# EAGLE board uCschematic (EAGLE 9.6.2)
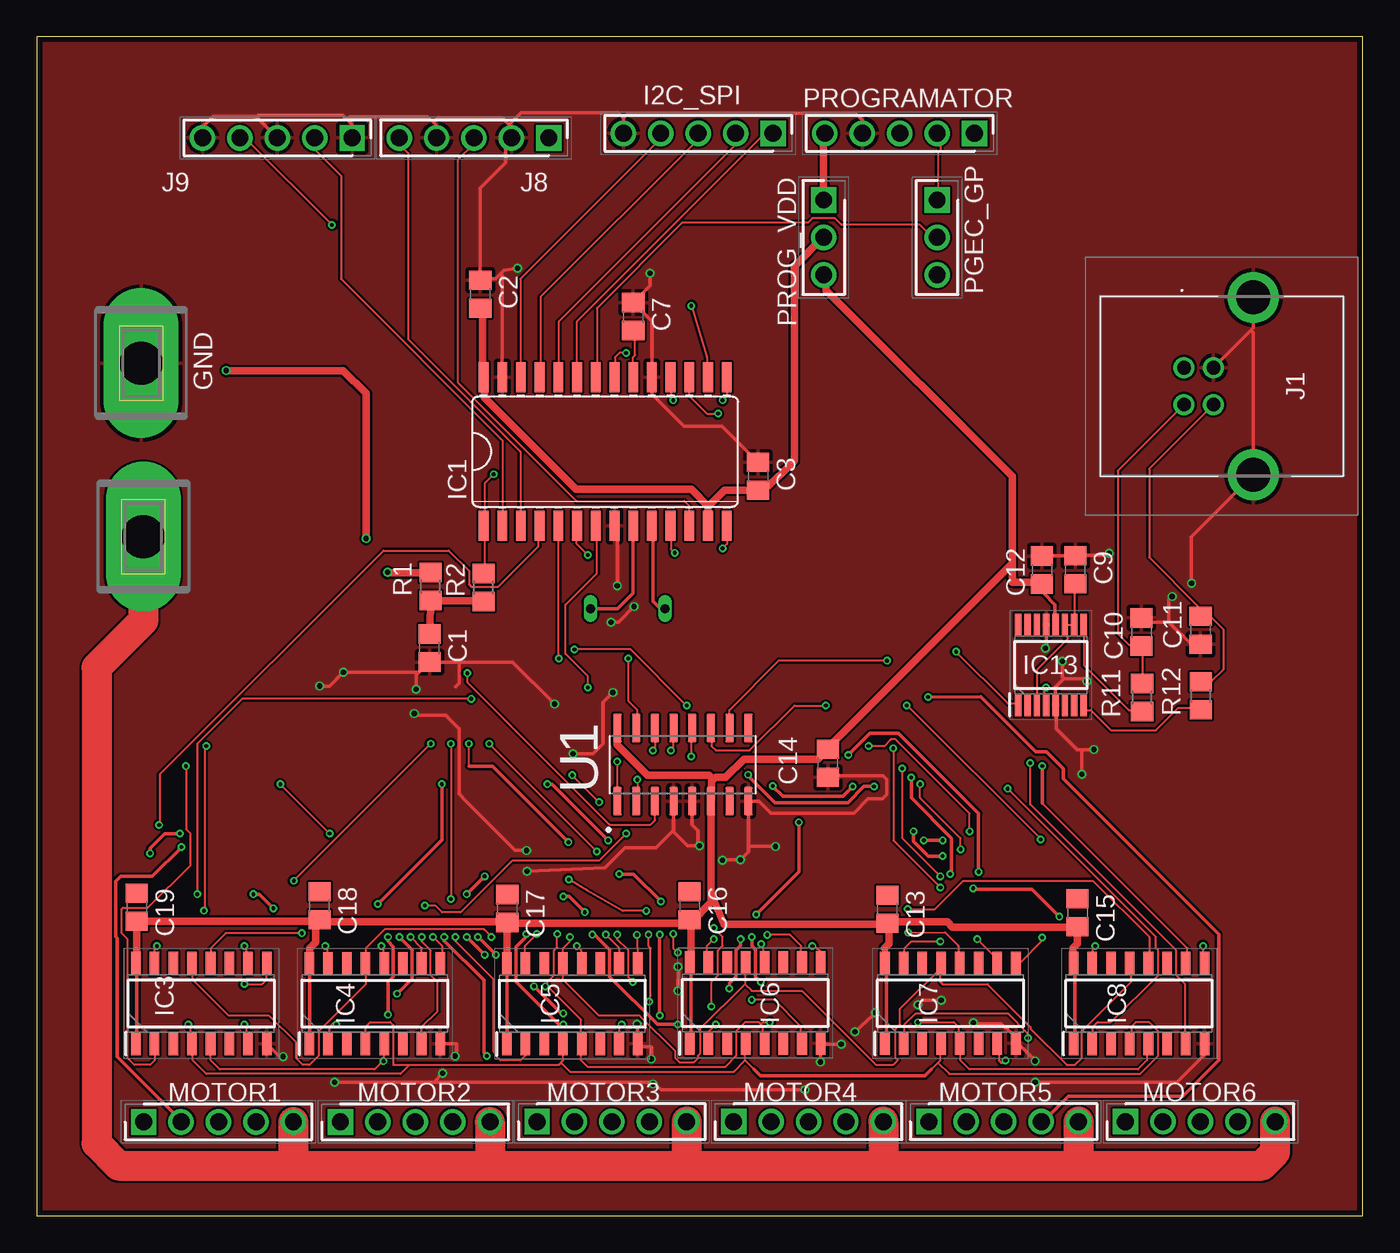
[diagram p0: board, top side]
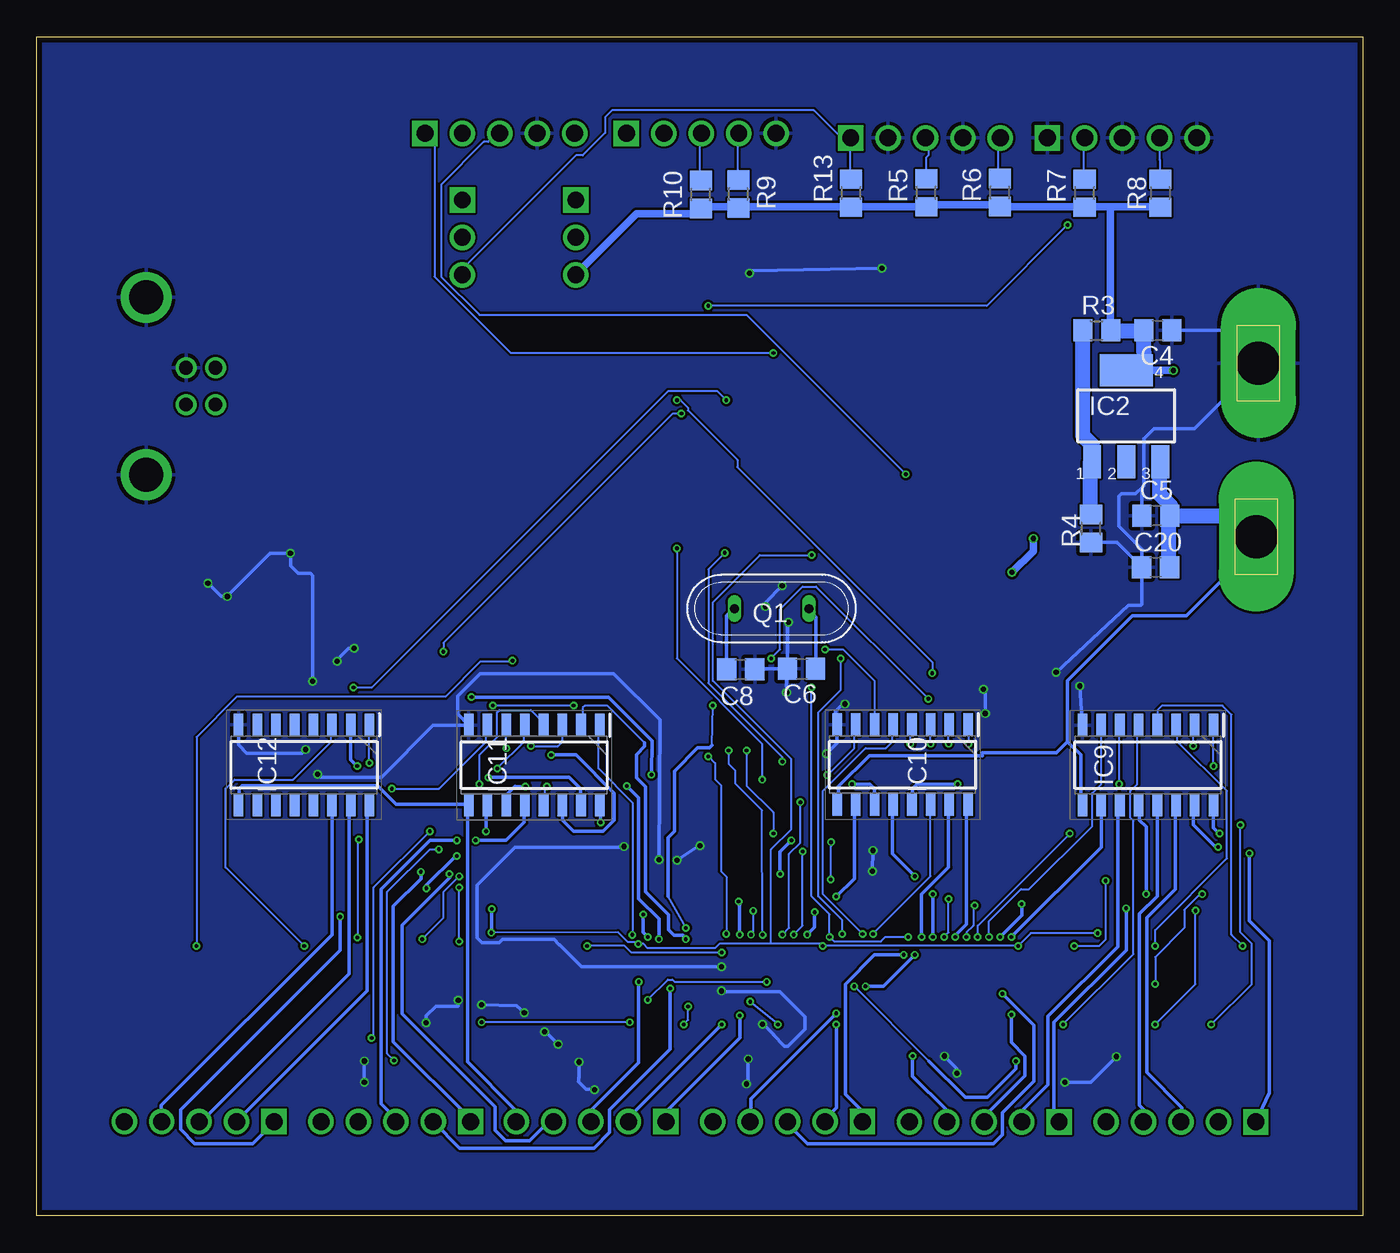
[diagram p1: board, bottom side, seen from below]

Size 90 x 80 mm. Coordinates in mm from the lower left corner, seen from the top.
Outline: 0,0 90,0 90,80 0,80 0,0
Copper layers (1*16): Top 0.035559375mm / dielectric 1.6mm / Bottom 0.035559375mm
Design rules "oshpark-2layer": minimum track width 6mil, minimum drill 10mil, track to track 6mil, track to pad 6mil, pad to pad 6mil, via to via 6mil, smd to smd 6mil, copper to edge 15mil, drill to drill 6mil, minimum pad ring 5mil, minimum via ring 5mil, stop-mask expansion 2.5mil, vias tented up to drill 0mil, thermal gap 10mil

## Footprints (pad centres in the part's own frame; a part is rotated, then mirrored left to right if it is on the bottom)
C0805 = smd 1.3 x 1.5: 1 -0.95,0; 2 0.95,0
62221 = drill 2.921 pad 5.08 long: 1 0,0
HDRV5W67P0X254_1X5_1270X241X85 = drill 1.15 pad 1.725 square: 1 0,0 | drill 1.15 pad 1.725: 2 2.54,0; 3 5.08,0; 4 7.62,0; 5 10.16,0
SO28W = smd 0.66 x 2.032: 1 -8.255,-5.029; 2 -6.985,-5.029; 3 -5.715,-5.029; 4 -4.445,-5.029; 5 -3.175,-5.029; 6 -1.905,-5.029; 7 -0.635,-5.029; 8 0.635,-5.029; 9 1.905,-5.029; 10 3.175,-5.029; 11 4.445,-5.029; 12 5.715,-5.029; 13 6.985,-5.029; 14 8.255,-5.029; 15 8.255,5.029; 16 6.985,5.029; 17 5.715,5.029; 18 4.445,5.029; 19 3.175,5.029; 20 1.905,5.029; 21 0.635,5.029; 22 -0.635,5.029; 23 -1.905,5.029; 24 -3.175,5.029; 25 -4.445,5.029; 26 -5.715,5.029; 27 -6.985,5.029; 28 -8.255,5.029
SOT223 = smd 1.219 x 2.235: 1 -2.311,-3.099; 2 0,-3.099; 3 2.311,-3.099 | smd 3.6 x 2.2: 4 0,3.099
SOIC127P600X175-16N = smd 1.55 x 0.65: 1 -2.725,4.445; 2 -2.725,3.175; 3 -2.725,1.905; 4 -2.725,0.635; 5 -2.725,-0.635; 6 -2.725,-1.905; 7 -2.725,-3.175; 8 -2.725,-4.445; 9 2.725,-4.445; 10 2.725,-3.175; 11 2.725,-1.905; 12 2.725,-0.635; 13 2.725,0.635; 14 2.725,1.905; 15 2.725,3.175; 16 2.725,4.445
SOIC127P600X175-16N' = smd 1.525 x 0.65: 1 -2.712,4.445; 2 -2.712,3.175; 3 -2.712,1.905; 4 -2.712,0.635; 5 -2.712,-0.635; 6 -2.712,-1.905; 7 -2.712,-3.175; 8 -2.712,-4.445; 9 2.712,-4.445; 10 2.712,-3.175; 11 2.712,-1.905; 12 2.712,-0.635; 13 2.712,0.635; 14 2.712,1.905; 15 2.712,3.175; 16 2.712,4.445
SOP64P599X175-16N = smd 1.526 x 0.435: 1 -2.712,2.222; 2 -2.712,1.588; 3 -2.712,0.952; 4 -2.712,0.318; 5 -2.712,-0.318; 6 -2.712,-0.952; 7 -2.712,-1.588; 8 -2.712,-2.222; 9 2.712,-2.222; 10 2.712,-1.588; 11 2.712,-0.952; 12 2.712,-0.318; 13 2.712,0.318; 14 2.712,0.952; 15 2.712,1.588; 16 2.712,2.222
UJ2BH1TH = drill 0.92 pad 1.431: 1 1.25,10.81; 2 -1.25,10.81; 3 -1.25,8.81; 4 1.25,8.81 | drill 2.3 pad 3.45: MH1 -6.02,6.1; MH2 6.02,6.1
HDRV3W97P0X254_1X3_721X234X821 = drill 1.15 pad 1.725 square: 1 0,0 | drill 1.15 pad 1.725: 2 2.54,0; 3 5.08,0
QS = drill 0.61 long: 1 -2.54,0; 2 2.54,0
R0805 = smd 1.3 x 1.5: 1 -0.95,0; 2 0.95,0
SOIC127P600X175-16N'' = smd 1.95 x 0.59: 1 -2.48,4.445; 2 -2.48,3.175; 3 -2.48,1.905; 4 -2.48,0.635; 5 -2.48,-0.635; 6 -2.48,-1.905; 7 -2.48,-3.175; 8 -2.48,-4.445; 9 2.48,-4.445; 10 2.48,-3.175; 11 2.48,-1.905; 12 2.48,-0.635; 13 2.48,0.635; 14 2.48,1.905; 15 2.48,3.175; 16 2.48,4.445

## Placement (x,y rotation side)
C1  100nF  [C0805]  26.66,38.53 270 top
C2  100nF  [C0805]  30.11,62.53 270 top
C3  100nF  [C0805]  48.96,50.18 270 top
C4  1u  [C0805]  13.91,60.08 180 bottom
C5  0.1u  [C0805]  14.04,47.51 0 bottom
C6  47pF  [C0805]  38.09,37.11 0 bottom
C7  10uF  [C0805]  40.49,61.02 270 top
C8  47pF  [C0805]  42.22,37.08 180 bottom
C9  0.1u  [C0805]  70.49,43.83 270 top
C10  47pF  [C0805]  74.99,39.62 270 top
C11  47pF  [C0805]  79,39.74 90 top
C12  0.1u  [C0805]  68.24,43.82 270 top
C13  0.1u  [C0805]  57.74,20.8 270 top
C14  0.1u  [C0805]  53.69,30.71 90 top
C15  0.1u  [C0805]  70.64,20.56 270 top
C16  0.1u  [C0805]  44.32,21.04 270 top
C17  0.1u  [C0805]  31.94,20.85 270 top
C18  0.1u  [C0805]  19.19,21.05 270 top
C19  0.1u  [C0805]  6.79,20.93 270 top
C20  100u  [C0805]  14.06,44.01 0 bottom
GND  PIN1-2  [62221]  7.08,57.86 90 top
I2C_SPI  68000-105HTLF  [HDRV5W67P0X254_1X5_1270X241X85]  49.98,73.45 180 top
IC1  PIC24FJXXGA002/SO  [SO28W]  38.58,51.86 0 top
IC2  317EMP  [SOT223]  16.06,54.28 0 bottom
IC3  MC74HC175ADG  [SOIC127P600X175-16N]  11.17,14.41 90 top
IC4  MC74HC175ADG  [SOIC127P600X175-16N]  22.95,14.4 90 top
IC5  MC74HC175ADG  [SOIC127P600X175-16N]  36.35,14.39 90 top
IC6  MC74HC175ADG  [SOIC127P600X175-16N]  48.77,14.44 90 top
IC7  MC74HC175ADG  [SOIC127P600X175-16N]  62.02,14.42 90 top
IC8  MC74HC175ADG  [SOIC127P600X175-16N]  74.82,14.41 90 top
IC9  ULN2003D1013TR  [SOIC127P600X175-16N']  14.58,30.58 270 bottom
IC10  ULN2003D1013TR  [SOIC127P600X175-16N']  31.23,30.61 270 bottom
IC11  ULN2003D1013TR  [SOIC127P600X175-16N']  56.24,30.58 270 bottom
IC12  ULN2003D1013TR  [SOIC127P600X175-16N']  71.87,30.6 270 bottom
IC13  FT230XS-U  [SOP64P599X175-16N]  68.84,37.38 90 top
J1  UJ2-BH-1-TH  [UJ2BH1TH]  88.68,56.3 90 top
J8  68000-105HTLF  [HDRV5W67P0X254_1X5_1270X241X85]  34.76,73.14 180 top
J9  68000-105HTLF  [HDRV5W67P0X254_1X5_1270X241X85]  21.41,73.14 180 top
MOTOR1  68000-105HTLF  [HDRV5W67P0X254_1X5_1270X241X85]  7.26,6.38 0 top
MOTOR2  68000-105HTLF  [HDRV5W67P0X254_1X5_1270X241X85]  20.61,6.38 0 top
MOTOR3  68000-105HTLF  [HDRV5W67P0X254_1X5_1270X241X85]  33.96,6.39 0 top
MOTOR4  68000-105HTLF  [HDRV5W67P0X254_1X5_1270X241X85]  47.31,6.39 0 top
MOTOR5  68000-105HTLF  [HDRV5W67P0X254_1X5_1270X241X85]  60.56,6.39 0 top
MOTOR6  68000-105HTLF  [HDRV5W67P0X254_1X5_1270X241X85]  73.91,6.39 0 top
PGEC_GP  5-146280-3  [HDRV3W97P0X254_1X3_721X234X821]  61.12,68.93 270 top
PROG_VDD  5-146280-3  [HDRV3W97P0X254_1X3_721X234X821]  53.42,68.93 270 top
PROGRAMATOR  68000-105HTLF  [HDRV5W67P0X254_1X5_1270X241X85]  63.66,73.45 180 top
Q1  [QS]  40.12,41.21 180 bottom
R1  10k  [R0805]  26.73,42.7 90 top
R2  220  [R0805]  30.33,42.64 90 top
R3  240  [R0805]  18.06,60.08 0 bottom
R4  390  [R0805]  18.44,46.64 90 bottom
R5  10k  [R0805]  29.63,69.42 90 bottom
R6  10k  [R0805]  24.63,69.44 90 bottom
R7  10k  [R0805]  18.88,69.4 90 bottom
R8  10k  [R0805]  13.74,69.4 270 bottom
R9  10k  [R0805]  42.38,69.34 90 bottom
R10  10k  [R0805]  44.93,69.3 90 bottom
R11  27  [R0805]  75.03,35.17 90 top
R12  27  [R0805]  79.02,35.28 90 top
R13  10k  [R0805]  34.73,69.4 90 bottom
U1  74HC237D-Q100J  [SOIC127P600X175-16N'']  43.86,30.62 90 top
VDD  12V  [62221]  7.24,46.09 270 top

## Library data of the parts
C1-C20 = eagle-ltspice; SPICEMODEL: NONE; SPICEPREFIX: C
GND VDD = con-faston; MF: TYCO ELECTRONICS; MPN: 62221-1; OC_FARNELL: unknown; OC_NEWARK: 16H2318
I2C_SPI J8 J9 MOTOR1-MOTOR6 PROGRAMATOR = 68000-105HTLF; ARROW_PART_NUMBER: 68000-105HTLF; ARROW_PRICE-STOCK: https://www.arrow.com/en/products/68000-105htlf/amphenol-fci; DESCRIPTION: 68000-105HTLF-B/S SR HDR 1*5; HEIGHT: 8.58mm; MANUFACTURER_NAME: Amphenol Communication Solutions; MANUFACTURER_PART_NUMBER: 68000-105HTLF; MOUSER_PART_NUMBER: 649-68000-105HTLF; MOUSER_PRICE-STOCK: https://www.mouser.co.uk/ProductDetail/Amphenol-FCI/68000-105HTLF?qs=w%2Fv1CP2dgqrYgNyQVoiqDw%3D%3D
IC1 = pic24gagb
IC2 = linear
IC3-IC8 = MC74HC175ADG; DESCRIPTION: ON Semiconductor MC74HC175ADG, D Type Flip Flop, LSTTL, 2 6 V, 16-Pin SOIC; HEIGHT: 1.75mm; MANUFACTURER_NAME: onsemi; MANUFACTURER_PART_NUMBER: MC74HC175ADG; MOUSER_PART_NUMBER: 863-MC74HC175ADG; MOUSER_PRICE-STOCK: https://www.mouser.co.uk/ProductDetail/onsemi/MC74HC175ADG?qs=qg33o%252B8vzFoIlG2G0iHepQ%3D%3D
IC9-IC12 = ULN2003D1013TR; DESCRIPTION: ULN2003D1013TR, Darlington Transistor Array, NPN 0.5A 50V, Array 7 HFE:1000, 16-Pin, SO; HEIGHT: 1.75mm; MANUFACTURER_NAME: STMicroelectronics; MANUFACTURER_PART_NUMBER: ULN2003D1013TR; MOUSER_PART_NUMBER: 511-ULN2003D1013TR; MOUSER_PRICE-STOCK: https://www.mouser.co.uk/ProductDetail/STMicroelectronics/ULN2003D1013TR?qs=YnPipOpXm6FQ98RZGZk5Pg%3D%3D
IC13 = FT230XS-U; ARROW_PART_NUMBER: FT230XS-U; ARROW_PRICE-STOCK: https://www.arrow.com/en/products/ft230xs-u/ftdi-chip; DESCRIPTION: USB Interface IC USB to Basic Serial UART IC SSOP-16; HEIGHT: 1.753mm; MANUFACTURER_NAME: FTDI Chip; MANUFACTURER_PART_NUMBER: FT230XS-U; MOUSER_PART_NUMBER: 895-FT230XS-U; MOUSER_PRICE-STOCK: https://www.mouser.co.uk/ProductDetail/FTDI/FT230XS-U?qs=Gp1Yz1mis3UZolxbXux7lw%3D%3D
J1 = UJ2-BH-1-TH; ARROW_PART_NUMBER: UJ2-BH-1-TH; ARROW_PRICE-STOCK: https://www.arrow.com/en/products/uj2-bh-1-th/cui-devices?region=nac; DESCRIPTION: USB Connectors USB 2.0 type B jack 4 pin Horizontal TH; HEIGHT: 10mm; MANUFACTURER_NAME: CUI Inc.; MANUFACTURER_PART_NUMBER: UJ2-BH-1-TH; MOUSER_PART_NUMBER: 490-UJ2-BH-1-TH; MOUSER_PRICE-STOCK: https://www.mouser.co.uk/ProductDetail/CUI-Devices/UJ2-BH-1-TH?qs=5mqXD9RfOg2PqeDe959d6w%3D%3D
PGEC_GP PROG_VDD = 5-146280-3; ARROW_PART_NUMBER: 5-146280-3; ARROW_PRICE-STOCK: https://www.arrow.com/en/products/5-146280-3/te-connectivity?region=nac; DESCRIPTION: Header vert 3 way 2.54mm AmpModu; HEIGHT: 8.21mm; MANUFACTURER_NAME: TE Connectivity; MANUFACTURER_PART_NUMBER: 5-146280-3; MOUSER_PART_NUMBER: 571-5-146280-3; MOUSER_PRICE-STOCK: https://www.mouser.co.uk/ProductDetail/TE-Connectivity/5-146280-3?qs=bwpFY26eRVf7xnwkMZzVxA%3D%3D
Q1 = special
R1-R10 R13 = eagle-ltspice; SPICEMODEL: NONE; SPICEPREFIX: R
R11 R12 = rcl; SPICEPREFIX: R
U1 = 74HC237D-Q100J; AVAILABILITY: In Stock; DESCRIPTION: Decoder/Demultiplexer 1 x 3:8 16-SO; MF: Nexperia USA Inc.; MP: 74HC237D-Q100J; PACKAGE: SOIC-16 Nexperia USA; PRICE: None; PURCHASE-URL: https://pricing.snapeda.com/search/part/74HC237D-Q100J/?ref=eda

## Nets
3.3V: C4.2 C12.2 C13.2 C14.2 C15.2 C16.2 C17.2 C18.2 C19.2 IC2.4 IC3.1 IC3.16 IC4.1 IC4.16 IC5.1 IC5.16 IC6.1 IC6.16 IC7.1 IC7.16 IC8.1 IC8.16 IC13.12 PROG_VDD.3 R1.2 R3.2 R5.1 R6.1 R7.1 R8.2 R9.1 R10.1 R13.1 U1.6 U1.16
12V: C5.2 C20.2 IC2.3 IC9.9 IC10.9 IC11.9 IC12.9 MOTOR1.5 MOTOR2.5 MOTOR3.5 MOTOR4.5 MOTOR5.5 MOTOR6.5 VDD.1
GND: C1.2 C2.1 C3.1 C4.1 C5.1 C6.1 C7.1 C8.1 C9.1 C10.1 C11.1 C12.1 C14.1 C20.1 GND.1 I2C_SPI.5 IC1.8 IC1.19 IC1.27 IC3.8 IC4.8 IC5.8 IC6.8 IC7.8 IC8.8 IC9.8 IC10.8 IC11.8 IC12.8 IC13.5 IC13.13 J1.4 J1.MH1 J1.MH2 J8.2 J8.4 J9.1 J9.3 J9.5 PROGRAMATOR.4 R4.1 U1.4 U1.5 U1.8
GP_OKIDAC: J8.1 PGEC_GP.3 R13.2
M0: IC3.9 U1.15
M0_0: IC3.2 IC9.1
M0_1: IC3.7 IC9.2
M0_2: IC3.10 IC9.3
M0_3: IC3.15 IC9.4
M1: IC4.9 U1.14
M1_0: IC4.2 IC9.5
M1_1: IC4.7 IC9.6
M1_2: IC4.10 IC9.7
M1_3: IC4.15 IC10.1
M2: IC5.9 U1.13
M2_0: IC5.2 IC10.2
M2_1: IC5.7 IC10.3
M2_2: IC5.10 IC10.4
M2_3: IC5.15 IC10.5
M3: IC6.9 U1.12
M3_0: IC6.2 IC10.6
M3_1: IC6.7 IC10.7
M3_2: IC6.10 IC11.1
M3_3: IC6.15 IC11.2
M4: IC7.9 U1.11
M4_0: IC7.2 IC11.3
M4_1: IC7.7 IC11.4
M4_2: IC7.10 IC11.5
M4_3: IC7.15 IC11.6
M5: IC8.9 U1.10
M5_0: IC8.2 IC11.7
M5_1: IC8.7 IC12.1
M5_2: IC8.10 IC12.2
M5_3: IC8.15 IC12.3
N$1: C1.1 R1.1 R2.1
N$2: IC1.1 PROGRAMATOR.3 R2.2
N$3: C7.2 IC1.20
N$4: C2.2 C3.2 IC1.13 IC1.28 PROG_VDD.2
N$6: C6.2 IC1.9 Q1.1
N$7: IC1.21 PROGRAMATOR.1
N$10: C8.2 IC1.10 Q1.2
N$11: IC2.1 R3.1 R4.2
N$12: IC1.7 IC3.13 IC4.13 IC5.13 IC6.13 IC7.13 IC8.13
N$13: IC1.6 IC3.12 IC4.12 IC5.12 IC6.12 IC7.12 IC8.12
N$14: IC1.11 U1.1
N$15: IC1.14 U1.2
N$16: IC1.15 U1.3
N$17: IC1.12 J8.3 R5.2
N$18: IC1.5 IC3.5 IC4.5 IC5.5 IC6.5 IC7.5 IC8.5
N$19: IC1.4 IC3.4 IC4.4 IC5.4 IC6.4 IC7.4 IC8.4
N$22: IC12.13
N$24: IC1.22 PGEC_GP.2
N$25: IC1.18 IC13.4
N$26: IC1.17 IC13.1
N$27: PROG_VDD.1 PROGRAMATOR.5
N$28: PGEC_GP.1 PROGRAMATOR.2
N$29: IC1.3 J8.5 R6.2
N$30: IC9.16 MOTOR1.1
N$31: IC9.15 MOTOR1.2
N$32: IC9.14 MOTOR1.3
N$33: IC9.13 MOTOR1.4
N$34: IC9.12 MOTOR2.1
N$35: IC9.11 MOTOR2.2
N$36: IC9.10 MOTOR2.3
N$37: IC1.2 J9.2 R7.2
N$38: IC1.16 J9.4 R8.1
N$39: I2C_SPI.1 IC1.23
N$40: I2C_SPI.2 IC1.24
N$41: I2C_SPI.3 IC1.25 R10.2
N$42: I2C_SPI.4 IC1.26 R9.2
N$45: C10.2 J1.2 R11.2
N$46: IC10.16 MOTOR2.4
N$47: IC10.15 MOTOR3.1
N$48: IC10.14 MOTOR3.2
N$49: IC10.13 MOTOR3.3
N$50: IC10.12 MOTOR3.4
N$51: IC10.11 MOTOR4.1
N$52: IC10.10 MOTOR4.2
N$53: C9.2 IC13.3 IC13.10 IC13.11
N$54: C11.2 J1.3 R12.2
N$55: IC13.9 R11.1
N$56: IC13.8 R12.1
N$58: C19.1
N$59: C18.1
N$61: IC12.15 MOTOR6.3
N$62: IC11.16 MOTOR4.3
N$63: IC11.15 MOTOR4.4
N$64: IC11.14 MOTOR5.1
N$65: IC11.13 MOTOR5.2
N$66: IC11.12 MOTOR5.3
N$67: IC11.11 MOTOR5.4
N$68: IC11.10 MOTOR6.1
N$69: C17.1
N$70: C16.1
N$73: IC12.4
N$74: IC12.5
N$75: IC12.6
N$76: IC12.7
N$77: C13.1
N$78: IC12.16 MOTOR6.2
N$80: IC12.14 MOTOR6.4
N$82: IC12.12
N$83: IC12.11
N$84: IC12.10
N$85: C15.1

## Tracks (layer width: path | path; a pad name or v marks a point on that pad's centre or on a via)
3.3V  (via drill 0.35)
  Top 0.152: 70.63,19.53 C15.2 | 70.33,17.25 IC8.16 70.48,17.1 | 70.48,11.76 IC8.1 | 57.51,17.16 57.54,17.17 IC7.16 57.68,17.1 | 57.68,11.76 IC7.1 | 57.83,19.84 C13.2 | 6.78,19.95 C19.2 | 6.78,17.25 IC3.16 6.78,17.1 | 6.78,11.76 IC3.1 | 18.51,17.25 IC4.16 18.51,17.1 | 18.51,11.76 IC4.1 | 19.09,19.99 C18.2 19.64,19.94 19.65,19.94 19.94,19.84 18.91,19.84 | 31.92,17.25 IC5.16 31.92,17.1 | 31.92,11.76 IC5.1 | 44.42,20 C16.2 | 44.42,17.25 IC6.16 44.42,17.1 | 44.42,11.76 IC6.1 | 68.34,42.85 C12.2 68.19,43 | 69.11,40.11 IC13.12 | 46.09,29.75 45.94,29.59 45.92,29.62 | 45.79,28.22 U1.6 | 53.74,31.8 C14.2 | 44.42,19.93 C16.2 | 32.52,19.84 C17.2 | 43.73,19.84 C16.2 | 39.39,33.1 U1.16 | 53.56,63.73 PROG_VDD.3
  Top 0.254: 70.48,17.1 70.48,11.76 | 57.68,17.1 57.68,11.76 | 6.78,17.1 6.78,11.76 | 18.51,17.1 18.51,11.76 | 31.92,17.1 31.92,11.76 | 44.42,17.1 44.42,11.76 | 68.34,42.85 68.34,42.24 69.11,41.48 69.11,40.11
  Top 0.406: 57.52,18.16 57.57,18.16 IC7.16
  Top 0.508: 70.63,19.53 70.63,18.47 70.33,18.16 70.33,17.25 | 57.52,18.16 57.83,18.47 57.83,19.84 57.83,19.94 61.8,19.94 62.15,19.59 70.61,19.59 C15.2 | 6.78,17.25 6.78,19.95 | 18.91,19.84 18.91,18.57 18.51,18.16 18.51,17.25 | 19.09,19.99 C19.2 | 31.92,17.25 31.92,19.84 32.52,19.84 43.73,19.84 | 44.42,17.25 44.42,20 | C14.2 53.01,30.98 47.99,30.98 46.76,29.75 46.09,29.75 | 45.79,28.22 45.79,29.49 45.92,29.62 45.64,29.9 41.47,29.9 39.39,31.98 39.39,33.1 | 68.19,43 66.21,43 66.21,44.27 | 53.74,31.8 66.21,44.27 | 44.42,19.93 45.76,21.27 U1.6 45.75,28.13 45.75,21.88 46.63,19.77 57.25,19.77 C13.2 | C17.2 31.89,19.94 19.64,19.94 | 53.56,63.73 53.56,62.82 66.21,50.17 66.21,44.27 | v12.86,57.36 20.8,57.36 22.36,55.81 v22.36,45.96 | v23.8,43.66 23.82,43.65 R1.2
  Bottom 0.152: 15,60.07 C4.2 | 16.99,60.07 R3.2 17.14,60.23 | 14.85,58.55 15.92,57.48 IC2.4 | 13.79,68.45 R8.2 | 18.81,68.45 R7.1 18.97,68.45 | 42.44,68.45 R9.1 42.28,68.45 | 44.88,68.45 R10.1 45.03,68.3 45.33,68 | 24.76,68.61 R6.1 24.61,68.45 | 29.48,68.61 R5.1 29.64,68.45 | 34.66,68.45 R13.1 34.82,68.45 | 53.41,63.88 PROG_VDD.3
  Bottom 0.508: 18.81,68.45 17.14,68.45 | 17.14,68.45 13.79,68.45 | 44.88,68.45 42.44,68.45 | 29.48,68.61 24.76,68.61 | 29.64,68.45 34.66,68.45 | 34.82,68.45 42.28,68.45 | 24.61,68.45 18.97,68.45 | 53.41,63.88 49.29,68 45.33,68 | 17.14,68.45 17.14,60.23 | IC2.4 12.87,57.38 v12.86,57.36 | v22.36,45.96 22.36,45.11 v23.8,43.66
  Bottom 1.016: 16.99,60.07 15,60.07 | 14.85,58.55 C4.2
12V
  Top 2.03: VDD.1 7.24,40.39 4.05,37.21 4.05,4.91 5.55,3.41 17.36,3.41 | 17.36,3.41 30.86,3.41 | 30.86,3.41 44.26,3.41 | 44.26,3.41 57.66,3.41 | 57.66,3.41 70.66,3.41 | 70.66,3.41 83.16,3.41 84.06,4.32 MOTOR6.5 | MOTOR5.5 70.72,3.47 70.66,3.41 | MOTOR4.5 57.47,3.6 57.66,3.41 | MOTOR3.5 44.12,3.55 44.26,3.41 | MOTOR2.5 30.77,3.5 30.86,3.41 | MOTOR1.5 17.41,3.47 17.36,3.41
  Bottom 0.152: 60.72,27.92 IC11.9 60.77,27.65 | 76.27,27.92 IC12.9 | 57.52,6.43 MOTOR4.5 | 13.18,44.07 C20.2 | 13.18,47.42 C5.2 13.02,47.58 13.02,48.19 | 19.12,27.92 IC9.9 | 35.58,27.92 IC10.9 | 13.79,51.08 IC2.3 | 25.82,31.22 25.82,31.42
  Bottom 0.254: 60.72,27.92 65.6,27.92 66.87,29.19 76.06,29.19 76.27,28.98 76.27,27.92 | 60.77,27.65 60.77,10.44 57.52,7.19 57.52,6.43 | 19.12,27.92 19.12,31.27 20.03,32.18 | 20.03,32.18 20.03,36.3 15.62,40.71 11.96,40.71 7.24,45.43 VDD.1 | 35.58,27.92 35.58,29.14 33.49,31.22 25.82,31.22 | 25.82,31.42 20.8,31.42 20.03,32.18
  Bottom 1.016: 13.18,47.42 13.18,44.07 | 13.79,51.08 13.79,48.95 13.02,48.19 | C5.2 8.65,47.51 VDD.1
GND  (via drill 0.35)
  Top 0.254: IC3.8 16.49,10.8 v16.73,10.8 | v28.4,10.84 28.5,10.94 28.5,11.68 28.5,11.67 IC4.8 | v41.71,10.64 41.71,11.44 41.68,11.47 40.98,11.47 IC5.8 40.79,12.83 v40.74,12.99 | 26.96,9.06 41.51,9.06 v41.82,8.94 42.41,8.56 v52.15,8.56 | 26.96,9.06 v20.2,9.06 | v53.19,10.44 53.21,10.44 IC6.8 53.29,11.63 v54.61,11.63 | v67.77,10.5 66.58,11.69 IC7.8 66.46,12.16 65.45,13.02 63.64,13.03 v63.57,13.11 | v67.77,9.06 77.37,9.06 79.21,10.9 79.21,11.63 IC8.8 | 26.96,9.06 v27.55,9.66 | 59.69,14.29 v59.8,14.32 60.12,14.64 v61.39,14.64 | v56.91,13.77 56.76,13.61 v55.54,12.48 | v19.2,35.95 19.88,35.95 v20.81,36.88 25.95,36.88 | 25.95,36.88 C1.2 28.71,37.58 | 28.71,37.58 32.3,37.58 v35.14,34.73 | v36.4,31.36 37.76,31.36 38.43,32.03 38.43,34.84 v39.1,35.51 | v38.97,40.28 39.47,40.28 v40.54,41.35 | v39.4,42.75 39.4,46.63 IC1.8 | J9.5 11.24,73.9 11.97,74.62 14.84,74.62 14.91,74.55 | 14.91,74.55 J9.3 | J9.1 21.41,74.03 21.05,74.39 | 21.05,74.39 20.76,74.68 15.04,74.68 14.91,74.55 | J8.4 27.14,73.97 26.92,74.19 | 26.92,74.19 26.54,74.56 21.22,74.56 21.05,74.39 | 32.05,74.03 32.22,73.86 J8.2 31.8,72.73 31.8,71.44 30.11,69.74 C2.1 30.23,63.6 31.16,63.6 31.48,63.93 | 32.05,74.03 31.57,74.51 27.24,74.51 26.92,74.19 | I2C_SPI.5 39.81,74.48 | 39.81,74.48 39.45,74.84 32.86,74.84 32.05,74.03 | PROGRAMATOR.4 56.03,74.34 55.56,74.81 40.15,74.81 39.81,74.48 | C3.1 46.52,53.57 43.92,53.57 41.75,55.74 IC1.19 41.75,60.7 C7.1 41.63,63.12 v41.63,63.96 | IC1.27 31.59,63.82 31.48,63.93 | v32.63,64.29 31.73,64.17 31.48,63.93 | J1.MH2 82.58,60.26 82.41,60.09 | 82.41,60.09 J1.4 | 82.41,60.09 82.58,59.92 J1.MH1 78.39,46.08 v78.39,42.93
  Top 0.254: C9.1 C12.1 | C11.1 78.36,38.79 76.86,40.29 | 76.86,40.29 75.26,40.29 C10.1 | 76.86,40.29 76.86,41.82 v77.07,42.03 | 70.78,45.11 70.47,44.8 70.47,44.53 70.61,44.53 70.75,44.66 70.59,44.82 72.66,44.82 v72.78,44.95 | 69.72,36.44 69.15,35.88 IC13.5 69.22,34.6 69.22,33.05 70.62,31.64 v71.74,31.64 70.94,31.64 v70.94,29.95 | 69.72,36.44 71.11,36.44 v71.28,36.27 | IC13.13 68.52,38.55 v68.47,38.5 | v69.61,37.63 69.61,36.55 69.72,36.44 | v43.53,15.26 43.55,16.86 v43.52,16.89 | 48.3,25.18 U1.8 49.01,28.14 49.82,27.33 55.46,27.33 56.42,28.29 57.4,28.29 57.72,28.61 57.72,29.57 57.43,29.86 53.8,29.86 C14.1 | 48.3,25.18 48.3,24.69 v47.77,24.15 46.55,24.15 v46.53,24.14 | U1.5 44.49,26.53 44.89,26.13 44.89,25.22 v44.99,25.12 44.17,25.12 43.22,26.07 U1.4 43.22,26.16 42.05,24.99 39.94,24.99 38.57,23.62 v33.27,23.37 | 48.3,25.18 48.42,25.06 v50.14,25.06 | v33.25,24.79 32.48,24.79 28.9,28.37 28.9,28.4 28.67,28.64 28.67,33.05 27.76,33.95 25.76,33.95 v25.62,34.09 | 28.42,35.89 28.67,36.14 28.67,37.54 28.71,37.58 | v25.76,35.73 25.76,36.68 25.95,36.88
  Bottom 0.254: v16.73,10.8 18.46,9.06 v20.2,9.06 | 28.4,10.76 v28.4,10.84 27.55,9.99 v27.55,9.66 | v53.19,10.44 53.19,9.37 53.22,9.37 53.22,9.1 52.72,8.6 52.18,8.6 v52.15,8.56 | v67.77,10.5 v67.77,9.06 | v41.71,10.64 41.71,9.05 v41.82,8.94 | v63.57,13.11 63.57,13.57 62.91,14.22 61.4,14.22 v61.39,14.64 | v59.8,14.32 57.42,14.25 v56.91,13.77 | v55.54,12.48 55.32,12.35 54.74,11.77 | 54.74,11.77 | 54.74,11.77 v54.61,11.63 | C4.1 9.29,60.08 GND.1 7.43,57.51 7.43,57.42 11.44,53.4 14.17,53.4 14.85,52.72 14.85,49.55 14.98,49.41 | R4.1 16.68,45.69 C20.1 | C20.1 15.01,45.24 16.54,46.78 16.54,48.82 16.38,48.98 15.41,48.98 14.98,49.41 | C5.1 14.98,49.41 | C20.1 15.01,41.49 15.05,41.44 15.9,41.44 v20.81,36.88 | v19.2,35.95 19.07,33.8 IC9.8 | v35.14,34.73 35.28,34.73 35.78,34.23 35.78,33.43 IC10.8 35.68,32.08 v36.4,31.36 | v39.1,35.51 39.1,37.04 C6.1 | C6.1 41.23,37.11 C8.1 | C6.1 39.03,40.21 v38.97,40.28 | v40.54,41.35 40.54,41.61 v39.4,42.75 | v32.63,64.29 41.47,64.12 v41.63,63.96 | v78.39,42.93 77.48,42.03 v77.07,42.03 74.14,44.95 v72.78,44.95 72.78,44.12 72.25,43.59 71.42,43.59 71.28,43.44 v71.28,36.27 | v68.47,38.5 68.84,38.5 69.47,37.87 69.47,37.77 v69.61,37.63 | IC12.8 76.31,31.95 75.76,31.4 71.98,31.4 v71.74,31.64 | v40.74,12.99 40.58,12.88 40.01,12.31 40.01,12.28 39.24,11.51 39,11.51 37.87,12.64 37.87,13.52 39.54,15.19 43.35,15.19 v43.53,15.26 | v43.52,16.89 53.02,16.89 54.52,18.4 54.54,18.4 54.89,18.75 58.39,18.75 58.62,18.53 59.78,18.53 60.12,18.87 60.12,22.42 57.53,25.01 50.19,25.01 v50.14,25.06 | v46.53,24.14 45.01,25.14 v44.99,25.12 | v70.94,29.95 70.76,29.77 66.61,29.77 63.09,33.29 IC11.8 61.45,34.06 61.45,35.25 59.9,36.8 50.84,36.8 47.7,33.65 v47.77,24.15
  Bottom 0.254: v33.27,23.37 v33.25,24.79 | v25.62,34.09 25.62,35.59 v25.76,35.73
  pour Top: -0.5,-0.5 91.78,-0.5 91.78,80.5 -0.5,80.5
  pour Bottom: -0.5,-0.5 93.81,-0.5 93.81,80.5 -0.5,80.5
GP_OKIDAC
  Bottom 0.152: R13.2 34.82,70.44 34.82,73.03 J8.1 34.82,73.18 35.43,73.18 37.26,75.01 50.97,75.01 51.43,74.55 51.43,73.48 52.95,71.96 53.41,71.96 61.03,64.34 61.03,63.88 PGEC_GP.3
M0  (via drill 0.25)
  Top 0.152: v14.09,15.72 15.31,15.72 15.61,16.03 15.61,17.1 IC3.9 | v10.89,21.82 10.89,32.03 13.94,35.08 v29.48,35.08 | v40.15,37.82 40.15,34.93 40.76,34.32 40.76,33.25 U1.15
  Bottom 0.152: v14.09,15.72 14.09,17.55 12.11,19.53 12.11,20.75 11.04,21.82 v10.89,21.82 | v29.48,35.08 37.1,42.7 38.02,42.7 39.54,41.17 39.54,38.43 v40.15,37.82
M0_0  (via drill 0.25)
  Top 0.152: v10.13,30.51 10.13,26.24 10.43,25.93 10.43,23.8 7.54,20.91 5.86,20.91 5.76,20.8 5.76,19.18 6.17,18.77 6.17,10.7 6.62,10.24 7.69,10.24 7.99,10.54 7.99,11.61 IC3.2
  Bottom 0.152: v10.13,30.51 10.13,33.25 IC9.1
M0_1  (via drill 0.25)
  Top 0.152: v11.5,31.88 11.4,31.78 11.4,20.75 v11.35,20.7 | v14.09,12.98 14.24,12.83 14.24,11.76 IC3.7
  Bottom 0.152: v11.5,31.88 11.5,33.25 IC9.2 | v11.35,20.7 11.35,15.72 v14.09,12.98
M0_2  (via drill 0.25)
  Top 0.152: v14.09,18.32 14.24,18.16 14.24,17.25 IC3.10
  Bottom 0.152: v14.09,18.32 14.09,19.38 9.21,24.26 9.21,28.83 12.57,32.18 12.57,33.25 IC9.3
M0_3  (via drill 0.25)
  Top 0.152: v8.15,18.32 7.99,18.16 7.99,17.25 IC3.15
  Bottom 0.152: v8.15,18.32 8.91,19.08 8.91,34.01 9.52,34.62 13.63,34.62 13.94,34.32 13.94,33.4 IC9.4
M1  (via drill 0.25)
  Top 0.152: v26.89,18.93 27.5,18.32 27.5,17.25 IC4.9 | v26.33,21.05 27.05,21.05 27.51,20.59 28.76,20.59 32.28,24.11 38.17,24.11 v40,25.93 | v41.83,31.57 41.98,31.73 41.98,33.1 U1.14
  Bottom 0.152: v26.89,18.93 26.89,19.23 26.43,19.69 26.43,20.95 v26.33,21.05 | v40,25.93 40,27.37 41.83,29.2 v41.83,31.57
M1_0  (via drill 0.25)
  Top 0.152: v20.34,12.98 20.19,13.13 19.88,12.83 19.88,11.76 IC4.2
  Bottom 0.152: v20.34,12.98 15.56,17.76 15.56,26.8 15.77,27 15.77,28.83 15.31,29.29 15.31,33.25 IC9.5
M1_1  (via drill 0.25)
  Top 0.152: v19.88,25.93 v16.53,29.29 | v26.13,18.93 26.13,18.62 26.74,18.01 26.74,16.33 27.2,15.88 27.2,13.89 26.13,12.83 26.13,11.76 IC4.7
  Bottom 0.152: v16.53,29.29 16.53,33.25 IC9.6 | v19.88,25.93 26.13,19.69 v26.13,18.93
M1_2  (via drill 0.25)
  Top 0.152: v25.37,18.93 26.13,18.16 26.13,17.25 IC4.10
  Bottom 0.152: v25.37,18.93 25.37,19.99 23.2,22.16 22.64,22.16 18.36,26.44 18.36,28.68 17.75,29.29 17.75,33.25 IC9.7
M1_3  (via drill 0.25)
  Top 0.152: v17.44,22.73 v26.74,32.03 | v19.58,18.32 19.73,18.16 19.73,17.25 IC4.15
  Bottom 0.152: v26.74,32.03 26.74,33.25 IC10.1 | v17.44,22.73 17.44,18.76 17.89,18.32 v19.58,18.32
M2  (via drill 0.25)
  Top 0.152: v40.73,19.06 40.76,17.25 IC5.9 | v43.05,31.57 43.2,31.73 43.2,33.1 U1.13
  Bottom 0.152: v40.73,19.06 40.76,27.51 42.58,29.32 42.58,30.19 43.05,30.66 v43.05,31.57
M2_0  (via drill 0.25)
  Top 0.152: v28.11,32.03 v28.11,21.5 | v28.42,18.93 28.42,18.63 31.01,16.04 31.01,11.15 31.18,10.98 31.18,10.82 31.46,10.54 32.84,10.54 33.14,10.85 33.14,11.61 IC5.2
  Bottom 0.152: v28.11,32.03 28.11,33.25 IC10.2 | v28.11,21.5 28.11,19.23 v28.42,18.93
M2_1  (via drill 0.25)
  Top 0.152: 29.33,30.51 v29.33,32.03 | v36.1,22.83 37.37,22.06 39.77,20.7 v41.37,20.7 | v41.52,19.08 41.52,18.32 41.67,18.16 41.67,14.96 v41.58,14.53 | v39.69,12.98 39.54,12.83 39.54,11.76 IC5.7
  Top 0.254: 29.33,30.51 30.94,30.51 v36.09,25.35
  Bottom 0.152: v29.33,32.03 29.33,33.25 IC10.3 | v36.09,25.35 36.09,25.05 v36.1,22.83 | v41.37,20.7 41.37,19.23 v41.52,19.08 | v39.69,12.98 v41.58,14.53
M2_2  (via drill 0.25)
  Top 0.152: v38.02,24.72 v30.7,32.03 | v38.63,19.08 39.54,18.16 39.54,17.25 IC5.10
  Bottom 0.152: v30.7,32.03 30.7,33.25 IC10.4 | v38.02,24.72 38.02,19.69 v38.63,19.08
M2_3  (via drill 0.25)
  Top 0.152: v33.95,19.13 33.14,18.32 33.14,17.25 IC5.15
  Bottom 0.152: v33.95,19.13 36.65,21.82 36.65,28.83 33.75,31.73 32.38,31.73 31.92,32.18 31.92,33.25 IC10.5
M3  (via drill 0.25)
  Top 0.152: v43.5,17.86 43.2,18.16 v43.2,19.14 | v44.42,31.17 44.42,33.1 U1.12 | v52.65,18.32 52.73,18.32 53.21,17.93 IC6.9
  Bottom 0.152: v52.65,18.32 50.09,18.32 49.63,17.86 v43.5,17.86 | v43.2,19.14 43.2,23.01 43.55,23.36 43.55,29.21 43.95,29.61 43.95,30.71 v44.42,31.17
M3_0  (via drill 0.25)
  Top 0.152: v36.49,38.43 40.3,38.43 v44.11,34.62 | v45.94,19.53 46.55,18.93 46.55,18.32 46.25,18.01 46.25,16.33 45.79,15.88 v45.79,14.2 | v46.09,12.98 45.64,12.52 45.64,11.76 IC6.2
  Bottom 0.152: v36.49,38.43 35.27,38.43 33.14,36.3 33.14,33.4 IC10.6 | 44.16,31.93 v44.11,34.62 | v45.94,19.53 47.16,21.69 | v45.79,14.2 45.79,13.29 v46.09,12.98
  Bottom 0.254: 44.16,31.93 44.34,31.75 45.15,31.75 46.72,30.18 46.72,26.11 47.16,25.67 47.16,21.69
M3_1  (via drill 0.25)
  Top 0.152: v38.17,28.07 v36.34,29.9 | v39.39,19.08 39.39,18.77 40.15,18.01 40.15,16.18 v40.45,15.88 | v48.53,14.66 50.06,14.66 51.88,12.83 51.88,11.76 IC6.7
  Bottom 0.152: v36.34,29.9 34.51,31.73 34.51,33.25 IC10.7 | v38.17,28.07 38.17,25.32 38.93,24.56 38.93,19.53 v39.39,19.08 | v40.45,15.88 46.7,15.88 46.86,16.03 47.16,16.03 v48.53,14.66
M3_2  (via drill 0.25)
  Top 0.152: v49.58,19.07 51.13,19.07 51.88,18.32 51.88,17.25 IC6.10
  Bottom 0.152: v49.58,19.07 49.55,19.09 49.55,28.02 51.88,30.36 51.88,33.25 IC11.1
M3_3  (via drill 0.25)
  Top 0.152: v45.94,18.77 45.48,18.32 45.48,17.25 IC6.15
  Bottom 0.152: 48.74,32.08 51.28,34.62 52.8,34.62 52.95,34.47 52.95,33.4 IC11.2 | v45.94,18.77 45.94,18.82
  Bottom 0.254: 48.74,32.08 48.74,31.87 49.3,31.3 49.3,29.74 48.69,29.13 48.69,22 47.12,20.43 47.12,19.41 46.73,19.03 46.15,19.03 45.94,18.82
M4  (via drill 0.25)
  Top 0.152: v68.24,18.88 68.24,18.67 66.82,17.25 66.52,17.25 IC7.9 | v59.05,34.62 59.1,34.62 68.14,25.58 v68.14,25.53 | v53.56,34.62 51.43,34.62 48.38,31.57 46.09,31.57 45.79,31.88 45.79,33.1 U1.11
  Bottom 0.152: v68.14,25.53 68.24,25.43 v68.24,18.88 | v53.56,34.62 v59.05,34.62
M4_0  (via drill 0.25)
  Top 0.152: v56.46,31.88 57.52,31.88 57.98,32.34 58.29,32.34 63.31,27.31 v63.31,26.09 | v67.28,12.07 67.25,12.1 67.25,12.39 65.9,13.74 59.66,13.74 58.9,12.98 58.9,11.76 IC7.2
  Bottom 0.152: v56.46,31.88 54.63,31.88 54.32,32.18 54.32,33.25 IC11.3 | v63.31,26.09 67.12,22.28 67.12,12.12 67.18,12.07 v67.28,12.07
M4_1  (via drill 0.25)
  Top 0.152: v59.96,29.29 59.96,28.37 62.71,25.63 v62.71,24.87 | v65.75,10.54 65.6,10.39 65.45,10.39 65.3,10.54 65.3,11.61 IC7.7
  Bottom 0.152: v59.96,29.29 59.96,31.27 58.74,32.49 58.74,34.16 58.59,34.32 56.46,34.32 55.7,33.55 55.7,33.4 IC11.4 | v62.71,24.87 63.31,24.87 66.21,21.97 66.21,11 v65.75,10.54
M4_2  (via drill 0.25)
  Top 0.152: v58.74,30.36 58.74,25.63 v61.33,23.04 | v63.84,18.77 65.3,17.31 65.3,17.25 IC7.10
  Bottom 0.152: v58.74,30.36 56.91,32.18 56.91,33.25 IC11.5 | v61.33,23.04 62.4,21.97 62.4,20.21 v63.84,18.77
M4_3  (via drill 0.25)
  Top 0.152: v58.13,31.73 58.13,25.48 v61.33,22.28 | v61.33,18.62 59.35,18.62 58.9,18.16 58.9,17.25 IC7.15
  Bottom 0.152: v58.13,31.73 58.13,33.25 IC11.6 | v61.33,18.62 v61.33,22.28
M5  (via drill 0.25)
  Top 0.152: v79.17,18.32 79.17,17.25 IC8.9 | v57.71,37.67 50.36,37.67 47.01,34.32 47.01,33.25 U1.10
  Bottom 0.152: v79.17,18.32 79.17,32.49 76.42,35.23 62.25,35.23 59.86,37.62 57.76,37.62 v57.71,37.67
M5_0  (via drill 0.25)
  Top 0.152: v65.91,28.98 75.96,18.93 75.96,18.16 76.12,18.01 76.12,16.33 72.92,13.13 72,13.13 71.7,12.83 71.7,11.76 IC8.2
  Bottom 0.152: v65.91,28.98 62.71,28.98 59.51,32.18 59.51,33.25 IC11.7
M5_1  (via drill 0.25)
  Top 0.152: v67.43,30.73 67.43,27.92 77.34,18.01 77.34,16.33 77.95,15.72 77.95,11.76 IC8.7
  Bottom 0.152: v67.43,30.73 67.43,33.25 IC12.1
M5_2  (via drill 0.25)
  Top 0.152: 68.25,27.98 78.1,18.16 78.1,17.25 IC8.10
  Top 0.254: v68.25,30.52 68.25,30.13 68.25,27.98
  Bottom 0.152: 68.8,33.25 IC12.2
  Bottom 0.254: v68.25,30.52 68.69,30.95 IC12.2
M5_3  (via drill 0.25)
  Top 0.152: v71.85,18.32 71.7,18.16 71.7,17.25 IC8.15
  Bottom 0.152: v71.85,18.32 77.18,23.65 77.18,28.98 76.57,29.59 72.61,29.59 70.02,32.18 70.02,33.25 IC12.3
N$1
  Top 0.152: 26.73,41.66 R1.1
  Top 0.508: C1.1 26.73,41.31 26.73,41.66 | R1.1 30.27,41.75 R2.1
N$2  (via drill 0.25)
  Top 0.152: R2.2 30.4,43.61 30.4,46.81 IC1.1 30.4,46.97 30.4,49.71 v31.01,50.32
  Bottom 0.152: v31.01,50.32 41.83,61.14 59.96,61.14 62.55,63.73 62.55,69.98 59.66,72.87 59.35,72.87 58.9,73.33 58.59,73.33 PROGRAMATOR.3
N$3
  Top 0.152: C7.2 40.61,59.92 40.61,58.4 40.45,58.24 40.45,57.02 IC1.20
N$4
  Top 0.152: 30.24,61.44 C2.2 | 30.24,57.02 IC1.28 30.4,56.87 | PROG_VDD.2 53.37,66.39 | 45.56,48.11 45.64,48.19
  Top 0.508: 30.24,57.02 30.24,61.44 | 45.64,48.19 46.68,49.23 C3.2 49.32,49.23 50.67,50.47 51.43,51.23 51.43,64.44 53.37,66.39 | 30.4,56.87 30.4,55.5 36.6,49.3 44.42,49.3 45.56,48.16 IC1.13 45.56,48.11
N$6
  Top 0.152: 40.45,46.81 IC1.9
  Top 0.254: 40.45,46.81 40.45,42.23 39.44,41.21 Q1.1
  Bottom 0.152: 37.1,37.21 C6.2 | 37.68,41.18 Q1.1
  Bottom 0.254: 37.1,37.21 37.1,40.6 37.68,41.18
N$7  (via drill 0.25)
  Top 0.152: v40,58.55 39.54,58.55 39.24,58.24 39.24,57.02 IC1.21
  Bottom 0.152: v40,58.55 57.83,58.55 63.01,63.73 63.01,72.72 63.62,73.33 PROGRAMATOR.1
N$10
  Top 0.152: 41.83,46.81 IC1.10
  Top 0.254: 41.83,46.81 41.83,41.7 42.32,41.21 Q1.2
  Bottom 0.152: 42.74,41.16 42.74,41.17 Q1.2 | 43.2,37.21 C8.2
  Bottom 0.254: 43.2,37.21 43.2,40.71 42.74,41.16
N$11
  Bottom 0.152: 18.51,47.73 R4.2 | 18.51,51.08 IC2.1 18.36,51.23 18.36,52.3
  Bottom 1.016: 18.51,51.08 18.51,47.73 | R3.1 19,59.83 19.02,59.82 19.02,52.96 18.36,52.3
N$12  (via drill 0.25)
  Top 0.152: IC3.13 10.59,17.1 10.59,16.03 13.02,13.59 15.77,13.59 17.59,11.76 17.59,10.7 18.05,10.24 18.51,10.24 19.12,10.85 19.12,12.52 22.32,15.72 22.32,17.1 IC4.13 22.32,17.25 22.32,18.16 23.59,19.43 30.34,19.43 v30.85,18.93 | 48.08,15.72 45.03,12.68 45.03,11 44.88,10.85 44.88,10.7 44.57,10.39 43.66,10.39 43.35,10.7 43.35,11.15 40.91,13.59 38.17,13.59 35.73,16.03 35.73,17.1 IC5.13 35.73,17.25 35.73,18.16 36.19,18.62 v36.19,18.93 | 48.08,15.72 48.08,17.1 IC6.13 | 61.33,16.78 61.33,15.88 61.49,15.72 64.53,15.72 67.46,12.8 67.46,12.7 69.91,10.24 70.48,10.24 70.94,10.7 70.94,12.52 74.29,15.88 74.29,17.1 IC8.13 | 61.33,16.78 61.33,17.1 IC7.13 | 61.33,16.78 58.59,14.03 58.59,12.98 58.29,12.68 58.29,10.7 58.44,10.54 58.13,10.24 56.97,10.24 51.94,15.27 48.53,15.27 48.08,15.72 | v37.41,35.84 37.41,36.6 35.88,38.13 35.88,41.48 38.02,43.61 38.02,46.81 IC1.7
  Bottom 0.152: v37.41,35.84 37.41,21.67 36.19,20.45 v36.19,18.93 35.88,18.62 32.69,18.62 32.38,18.93 v30.85,18.93
N$13  (via drill 0.25)
  Top 0.152: v17.99,19.18 12.82,19.18 11.8,18.16 11.8,17.25 IC3.12 | v23.39,18.32 23.54,18.16 23.54,17.25 IC4.12 | v36.65,18.32 36.95,18.01 36.95,17.25 IC5.12 | v49.17,18.45 49.29,18.32 49.29,17.25 IC6.12 | v59.15,19.21 61.64,19.23 62.55,18.32 62.55,17.25 IC7.12 | v59.12,20.81 60.96,20.79 62.9,22.73 71.7,22.73 75.51,18.93 75.51,17.25 IC8.12 | v37.41,44.83 36.65,45.59 36.65,46.81 IC1.6
  Bottom 0.152: v17.99,19.18 22.52,19.18 v23.39,18.32 v36.65,18.32 36.8,18.47 40.15,18.47 | 40.15,18.47 43.66,18.47 43.96,18.16 48.53,18.16 48.82,18.45 v49.17,18.45 49.29,18.45 49.43,18.58 49.9,18.58 50.55,19.23 v59.15,19.21 | v37.41,44.83 40.91,44.83 44.11,41.63 44.11,36.3 38.78,30.96 38.78,26.24 40.15,24.87 40.15,18.47
  Bottom 0.254: v59.12,20.81 59.12,19.24 v59.15,19.21
N$14  (via drill 0.25)
  Top 0.152: v39.39,30.81 39.39,28.22 U1.1 | v43.3,44.99 43.05,45.24 43.05,46.81 IC1.11
  Bottom 0.152: v39.39,30.81 39.39,31.12 44.42,36.15 44.42,43.87 v43.3,44.99
N$15  (via drill 0.25)
  Top 0.152: v40.76,29.59 40.76,28.22 U1.2 | v46.55,45.29 46.86,45.59 46.86,46.81 IC1.14
  Bottom 0.152: v40.76,29.59 40.76,32.03 46.55,37.82 v46.55,45.29
N$16  (via drill 0.25)
  Top 0.152: v29.22,36.82 29.22,36.21 38.88,26.55 41.67,26.55 41.98,26.85 41.98,28.07 U1.3 | v46.55,55.35 46.86,55.65 46.86,56.87 IC1.15
  Bottom 0.152: v29.22,36.82 29.22,37.56 42.45,50.8 42.45,51.3 45.8,54.65 45.8,54.85 46.3,55.35 v46.55,55.35
N$17
  Top 0.152: IC1.12 44.27,46.97 44.27,48.19 44.16,48.29 43.96,48.49 36.65,48.49 28.57,56.57 28.57,71.66 29.64,72.72 29.64,73.03 J8.3
  Bottom 0.152: R5.2 29.64,70.44 29.64,71.81 29.48,71.96 29.48,72.87 29.64,73.03 J8.3
N$18  (via drill 0.25)
  Top 0.152: IC8.5 75.36,11.61 75.36,10.54 74.75,9.93 63.31,9.93 62.71,10.54 62.71,11.61 IC7.5 62.55,11.76 62.55,12.83 62.25,13.13 v59.81,13.13 | 23.54,10.54 22.93,9.93 12.41,9.93 11.8,10.54 11.8,11.61 IC3.5 | 23.54,10.54 23.54,11.61 IC4.5 | 49.14,12.98 49.29,12.83 49.29,11.76 IC6.5 | 49.14,12.98 48.99,13.13 48.08,13.13 47.47,12.52 47.47,10.85 46.7,10.09 37.41,10.09 36.95,10.54 36.95,11.61 IC5.5 36.95,11.76 36.95,13.29 34.66,15.57 | v35.43,37.82 35.43,46.81 IC1.5 | v35.33,19.13 35.33,18.21 35.12,18.01 35.12,16.33 34.66,15.88 34.66,15.57 | 23.54,10.54 v23.54,10.49 v23.53,10.49 | 34.66,15.57 v34.51,15.57 | v49.75,13.13 49.29,13.13 49.14,12.98
  Bottom 0.152: v35.43,37.82 35.43,35.69 36.95,34.16 36.95,21.67 35.33,20.04 v35.33,19.13 | v34.51,15.57 29.43,10.49 | v49.75,13.13 v59.81,13.13
  Bottom 0.254: 29.43,10.49 26.97,8.03 25.49,8.03 23.53,9.98 v23.53,10.49
N$19  (via drill 0.25)
  Top 0.152: 25.29,10.24 24.68,9.63 11.5,9.63 10.59,10.54 10.59,11.61 IC3.4 10.43,11.76 10.43,12.83 v10.28,12.98 | IC4.4 22.32,11.76 22.32,12.83 22.62,13.13 24,13.13 24.2,12.93 24.2,10.24 25.29,10.24 | 35.58,10.39 35.43,10.24 25.29,10.24 | 35.58,10.39 35.73,10.54 35.73,11.61 IC5.4 | 48.08,10.54 48.08,11.61 IC6.4 | 48.08,10.54 47.31,9.78 36.19,9.78 35.58,10.39 | 60.72,9.93 61.18,10.39 | 61.18,10.39 61.33,10.54 61.33,11.61 IC7.4 | 48.08,10.54 48.69,9.93 | 61.18,10.39 61.94,9.63 74.9,9.63 76.12,10.85 76.12,12.52 75.51,13.13 74.59,13.13 74.29,12.83 74.29,11.76 IC8.4 | v8.3,26.52 8.35,26.52 8.35,29.95 23.54,45.14 27.96,45.14 29.33,43.77 29.33,42.85 29.48,42.7 31.31,42.7 34.05,45.44 34.05,46.81 IC1.4
  Top 0.254: 48.69,9.93 48.7,9.93 49.13,9.5 60.29,9.5 60.72,9.93
  Bottom 0.152: v8.3,26.52 8.3,19.23 7.54,18.47 7.54,15.72 v10.28,12.98
N$24
  Top 0.152: IC1.22 38.02,57.02 38.02,61.6 43.81,67.39 52.34,67.39 52.65,67.69 54.17,67.69 54.63,67.23 59.96,67.23 60.72,66.47 61.03,66.47 PGEC_GP.2
N$25  (via drill 0.25)
  Top 0.152: v68.5,35.84 68.34,35.69 68.34,35.54 68.5,35.38 68.5,34.77 IC13.4 | v43.2,55.35 43.05,55.5 43.05,56.87 IC1.18
  Bottom 0.152: v68.5,35.84 67.27,35.84 47.15,55.96 43.81,55.96 v43.2,55.35
N$26  (via drill 0.25)
  Top 0.152: v62.4,38.28 65.91,34.77 66.52,34.77 IC13.1 | v46.25,54.43 45.48,54.43 44.27,55.65 44.27,56.87 IC1.17
  Bottom 0.152: v62.4,38.28 62.4,38.88 46.85,54.43 v46.25,54.43
N$27
  Top 0.152: 53.41,69.06 PROG_VDD.1 | 53.41,73.33 PROGRAMATOR.5
  Top 0.508: 53.41,73.33 53.41,69.06
N$28
  Top 0.152: PGEC_GP.1 61.18,69.06 61.18,72.11 61.33,72.27 61.33,73.18 61.18,73.33 PROGRAMATOR.2
N$29
  Top 0.152: IC1.3 32.84,46.97 32.84,51.84 25.21,59.46 25.21,72.11 24.61,72.72 24.61,73.03 J8.5
  Bottom 0.152: R6.2 24.76,70.44 24.76,72.87 24.61,73.03 J8.5
N$30  (via drill 0.25)
  Top 0.254: v7.69,24.6 7.69,24.95 8.67,25.93 v9.72,25.93
  Bottom 0.152: 10.13,27.76 IC9.16
  Bottom 0.254: 10.13,27.76 10.13,26.34 v9.72,25.93 | v7.69,24.6 7.69,20.03 6.33,18.67 6.33,8.35 MOTOR1.1
N$31  (via drill 0.25)
  Top 0.152: 5.46,18.82 5.35,18.93 | 9.67,6.58 9.67,6.43 MOTOR1.2
  Top 0.254: v9.82,25.02 7.84,23.04 5.71,23.04 5.35,22.68 5.35,18.93 | 5.46,18.82 5.46,10.79 9.67,6.58
  Bottom 0.152: 11.5,27.76 IC9.15
  Bottom 0.254: 11.5,27.76 11.5,26.55 9.97,25.02 v9.82,25.02
N$32
  Bottom 0.152: 12.72,27.76 IC9.14 | 12.26,6.43 MOTOR1.3
  Bottom 0.254: 12.72,27.76 12.72,22.16 14.65,20.23 14.65,9.73 12.26,7.34 12.26,6.43
N$33
  Bottom 0.152: 13.94,27.76 IC9.13 | 14.85,6.43 MOTOR1.4
  Bottom 0.254: 13.94,27.76 13.94,21.7 15.15,20.48 15.15,7.49 14.85,7.19 14.85,6.43
N$34  (via drill 0.25)
  Top 0.254: v16.05,20.86 15.1,21.82 v14.7,21.82
  Bottom 0.152: 20.95,6.73 20.64,6.43 MOTOR2.1 | 15.16,27.76 IC9.12
  Bottom 0.254: 15.16,27.76 15.16,26.85 14.7,26.39 v14.7,21.82 | v16.05,20.86 16.05,18.03 20.95,13.13 20.95,6.73
N$35
  Bottom 0.152: 23.08,7.19 23.08,6.43 MOTOR2.2 | 16.63,27.54 IC9.11
  Bottom 0.254: 16.63,27.54 16.63,18.26 21.36,13.52 21.36,8.91 23.08,7.19
N$36  (via drill 0.25)
  Top 0.254: v23.84,18.93 23.84,18.62 24.2,18.27 24.2,16.23 23.84,15.88 v23.84,13.64
  Bottom 0.152: 25.67,6.74 25.67,6.43 MOTOR2.3 | 17.75,27.76 IC9.10
  Bottom 0.254: 17.75,27.76 17.75,25.02 v23.84,18.93 | v23.84,13.64 23.84,11.76 22.92,10.84 22.92,9.49 25.67,6.74
N$37
  Top 0.152: IC1.2 31.62,46.97 31.62,52.6 20.64,63.58 20.64,70.59 18.97,72.27 18.97,73.03 J9.2
  Bottom 0.152: R7.2 18.97,70.44 18.97,73.03 J9.2
N$38  (via drill 0.25)
  Top 0.152: v44.43,61.75 45.48,58.24 45.48,57.02 IC1.16 | v20.03,67.23 14.24,73.03 13.79,73.03 J9.4
  Bottom 0.152: R8.1 13.79,70.44 13.79,71.66 13.79,73.02 13.79,73.03 J9.4 | v44.43,61.75 25.52,61.75 v20.03,67.23
N$39
  Top 0.152: IC1.23 36.65,57.02 36.65,60.68 49.29,73.33 49.9,73.33 I2C_SPI.1
N$40
  Top 0.152: IC1.24 35.43,57.02 35.43,60.68 47.31,72.57 47.31,73.33 I2C_SPI.2
N$41
  Top 0.152: IC1.25 34.21,57.02 34.21,62.36 44.88,73.03 44.88,73.33 I2C_SPI.3
  Bottom 0.152: R10.2 45.03,70.28 45.03,73.33 I2C_SPI.3
N$42
  Top 0.152: IC1.26 32.84,57.02 32.84,63.58 42.28,73.03 42.28,73.33 I2C_SPI.4
  Bottom 0.152: R9.2 42.44,70.44 42.44,73.33 I2C_SPI.4
N$45
  Top 0.152: R11.2 75.05,36.15 75.05,38.58 C10.2 74.9,38.74 74.14,38.74 73.37,39.5 73.37,50.55 J1.2
N$46  (via drill 0.25)
  Top 0.254: v27.65,18.93 27.65,18.68 30.35,15.98 30.35,11.05 v30.55,10.85
  Bottom 0.152: 26.89,27.76 IC10.16 | 28.26,6.43 MOTOR2.4
  Bottom 0.254: 26.89,27.76 26.89,19.79 27.65,19.02 v27.65,18.93 | v30.55,10.85 30.55,9.48 28.26,7.19 28.26,6.43
N$47  (via drill 0.25)
  Top 0.254: v31.16,17.7 v29.94,18.93
  Bottom 0.152: 28.11,27.76 IC10.15 | 34.05,6.43 MOTOR3.1
  Bottom 0.254: 28.11,27.76 28.11,23.65 29.94,21.82 v29.94,18.93 | v31.16,17.7 33.14,17.7 35.12,15.72 35.12,8.26 34.05,7.19 34.05,6.43
N$48  (via drill 0.25)
  Top 0.152: 32.53,18.01
  Top 0.254: v33.24,19.13 33.24,18.98 32.53,18.27 32.53,18.01 | 32.53,18.01 32.53,15.88 35.43,12.98 v35.73,12.98
  Bottom 0.152: v33.24,19.13 29.33,23.04 29.33,27.76 IC10.14 | 36.65,6.43 MOTOR3.2
  Bottom 0.254: v35.73,12.98 35.73,7.34 36.65,6.43
N$49  (via drill 0.25)
  Top 0.254: v27.5,29.29 27.5,25.5 v23.15,21.15 | v24.61,18.93 25.47,18.06 25.47,16.08 v24.45,15.07
  Bottom 0.152: 24.45,6.58 | 24.45,5.82 | MOTOR3.3 39.03,6.23 | 30.55,27.92 IC10.13
  Bottom 0.254: 30.55,27.92 30.55,28.98 30.24,29.29 v27.5,29.29 | v23.15,21.15 23.15,20.38 v24.61,18.93 | v24.45,15.07 22.32,12.93 22.32,9.12 24.45,6.99 24.45,6.58 | 24.45,5.82 24.45,6.58 | 24.45,5.82 24.45,5.51 25.06,4.9 37.7,4.9 39.03,6.23
N$50  (via drill 0.25)
  Top 0.254: v29.18,21.82 v30.4,23.04 | v30.4,17.7 v29.18,18.93 | v33.75,15.57 35.58,13.74 v35.73,13.74
  Bottom 0.152: 31.92,27.76 IC10.12 | 41.52,6.43 MOTOR3.4
  Bottom 0.254: 31.92,27.76 31.92,24.56 v30.4,23.04 | v29.18,18.93 v29.18,21.82 | v30.4,17.7 32.53,15.57 v33.75,15.57 | v35.73,13.74 41.52,7.95 41.52,6.43
N$51  (via drill 0.25)
  Top 0.254: v34.66,29.29 34.97,29.29 v38.78,25.48 | v42.37,21.34 40.51,23.19 v39.54,23.19 | v42.28,13.59 v42.28,19.08
  Bottom 0.152: v38.78,25.47 v38.78,25.48 | 33.14,27.92 IC10.11 | 47.16,6.43 MOTOR4.1
  Bottom 0.254: 33.14,27.92 33.14,28.98 33.45,29.29 v34.66,29.29 | v38.78,25.47 39.54,24.71 v39.54,23.19 | v42.28,19.08 42.31,19.11 42.31,21.29 v42.37,21.34 | v42.28,13.59 42.28,12.07 47.16,7.19 47.16,6.43
N$52  (via drill 0.25)
  Top 0.254: v37.2,20.6 36.13,21.67 v35.73,21.67 | v37.71,19.08 37.86,19.08 38.88,18.06 38.88,16.23 42.13,12.98 v43.5,12.98
  Bottom 0.152: 49.75,6.73 49.75,6.43 MOTOR4.2 | 34.51,27.76 IC10.10
  Bottom 0.254: 34.51,27.76 34.51,22.89 v35.73,21.67 | v37.2,20.6 37.2,19.59 v37.71,19.08 | 49.75,6.73 v43.5,12.98
N$53
  Top 0.152: C9.2 70.48,42.85 70.48,40.11 IC13.10 70.33,40.11 69.87,40.11 IC13.11 69.87,39.96 69.87,39.35 70.02,39.19 67.89,37.06 67.89,34.77 IC13.3
N$54
  Top 0.152: R12.2 79.17,36.3 79.77,36.3 80.54,37.06 80.54,39.8 79.77,40.56 79.01,40.56 C11.2 78.86,40.72 78.86,41.33 75.51,44.68 75.51,50.68 J1.3
N$55
  Top 0.152: R11.1 74.9,34.32 74.14,34.32 71.09,37.37 71.09,39.96 IC13.9
N$56
  Top 0.152: R12.1 79.01,34.47 77.49,34.47 75.96,32.95 72.92,32.95 71.55,34.32 71.09,34.32 70.94,34.47 70.94,34.62 IC13.8
N$61
  Bottom 0.152: 68.8,27.76 IC12.15
  Bottom 0.254: 68.8,27.76 68.8,16.44 78.85,6.39 MOTOR6.3
N$62  (via drill 0.25)
  Top 0.254: v51.73,26.7 51.73,23.34 v48.84,20.45 | v48.53,18.93 48.53,18.32 48.78,18.06 48.78,16.23 v49.14,15.88
  Bottom 0.152: 51.73,27.76 IC11.16 | 52.34,6.43 MOTOR4.3
  Bottom 0.254: v51.73,26.7 51.73,27.76 | v48.84,20.45 48.84,19.23 v48.53,18.93 | v49.14,15.88 49.14,10.39 52.34,7.19 52.34,6.43
N$63  (via drill 0.25)
  Top 0.254: v59.35,29.75 59.35,28.37 62.1,25.63 62.1,23.29 v62,23.19
  Bottom 0.152: 55.28,6.39 55.27,6.39 | 53.1,27.92 IC11.15
  Bottom 0.254: 53.1,27.92 53.1,28.97 53.88,29.75 v59.35,29.75 | v62,23.19 62,22.93 65.2,19.73 65.2,13.7 58.9,7.39 58.9,5.82 58.18,5.1 56.56,5.1 55.28,6.39 | MOTOR4.4 55.27,6.39
N$64  (via drill 0.25)
  Top 0.254: v55.09,31.27 56.56,32.74 58.49,32.74 63.92,27.3 v63.92,23.34
  Bottom 0.152: 54.32,27.76 IC11.14
  Bottom 0.254: 54.32,27.76 54.32,26.85 53.56,26.09 51.58,26.09 50.82,26.85 50.82,28.68 53.41,31.27 v55.09,31.27 | v63.92,23.34 63.92,22.88 65.81,21 65.81,11.82 60.55,6.57 MOTOR5.1
N$65  (via drill 0.25)
  Top 0.254: v55.39,29.14 54.73,28.47 50.64,28.47 v49.95,29.16 | v47.77,18.77 47.77,18.32 47.47,18.01 47.47,16.23 47.01,15.78 v47.01,15.42
  Bottom 0.152: v55.39,29.14 55.54,28.98 55.54,27.92 IC11.13 | 49.93,29.16 v49.95,29.16 | MOTOR5.2 63.08,6.39
  Bottom 0.254: 49.93,29.16 49.14,28.37 49.14,21.52 47.77,20.14 v47.77,18.77 | v47.01,15.42 47.01,11.3 51.12,7.19 51.12,5.67 52.19,4.6 61.29,4.6 63.08,6.39
N$66  (via drill 0.25)
  Top 0.254: v61.49,25.48 v60.22,25.48
  Bottom 0.152: 65.75,6.73 65.75,6.43 MOTOR5.3 | 56.91,27.76 IC11.12
  Bottom 0.254: 56.91,27.76 56.91,26.7 58.13,25.48 v60.22,25.48 | v61.49,25.48 63.31,25.48 66.62,22.18 66.62,7.59 65.75,6.73
N$67  (via drill 0.25)
  Top 0.152: v48.28,29.93 48.23,29.9 | 68.19,6.28 MOTOR5.4
  Top 0.254: v56.83,29.14 56.15,29.14 55.05,28.04 50.09,28.04 48.23,29.9 | v60.49,35.2 64.08,35.23 67.83,31.48 68.53,31.48 69.69,30.32 69.69,29.64 80.23,19.1 80.23,10.54 77.79,8.1 70.02,8.1 68.19,6.28
  Bottom 0.152: v56.83,29.14 57.53,29.14 | 58.13,27.92 IC11.11
  Bottom 0.254: 58.13,27.92 58.13,28.53 57.53,29.14 | v48.28,29.93 48.23,32.23 51.18,35.18 60.67,35.18 v60.49,35.2
N$68  (via drill 0.25)
  Top 0.152: 63.62,22.18 v63.57,22.23
  Top 0.254: v59.51,26.09 59.51,25.43 60.52,24.41 v61.49,24.41 | 63.62,22.18 67.53,22.18 v69.41,20.3
  Bottom 0.152: v63.57,22.23 63.57,22.43 | 80.23,6.88 | 73.99,6.28 73.98,6.28 MOTOR6.1 | 59.51,27.76 IC11.10
  Bottom 0.254: v59.51,26.09 59.51,27.76 | 63.57,22.43 61.59,24.41 v61.49,24.41 | v69.41,20.3 69.41,18.01 80.23,7.19 80.23,6.88 | 80.23,6.88 80.23,5.86 79.27,4.9 75.36,4.9 73.99,6.28
N$78
  Bottom 0.152: MOTOR6.2
  Bottom 0.254: MOTOR6.2 67.58,15.27 67.58,27.53 67.42,27.69 IC12.16
N$80
  Bottom 0.152: MOTOR6.4 81.55,6.41 | 69.97,27.86 IC12.14
  Bottom 0.254: 69.97,27.86 69.97,19.07 81.55,7.49 81.55,6.41